# Altium PCB SiLPA.PcbDoc (part 10 of 10)
Units mm, origin at the board's own origin, x right, y up, seen from the top; angles counter-clockwise.
Board outline 222.36 x 100 mm, 4 copper layers (L1, P2, L3, L4), stack 1.598 mm thick; 583 components, 330 nets, 1692 pads, 1781 vias.
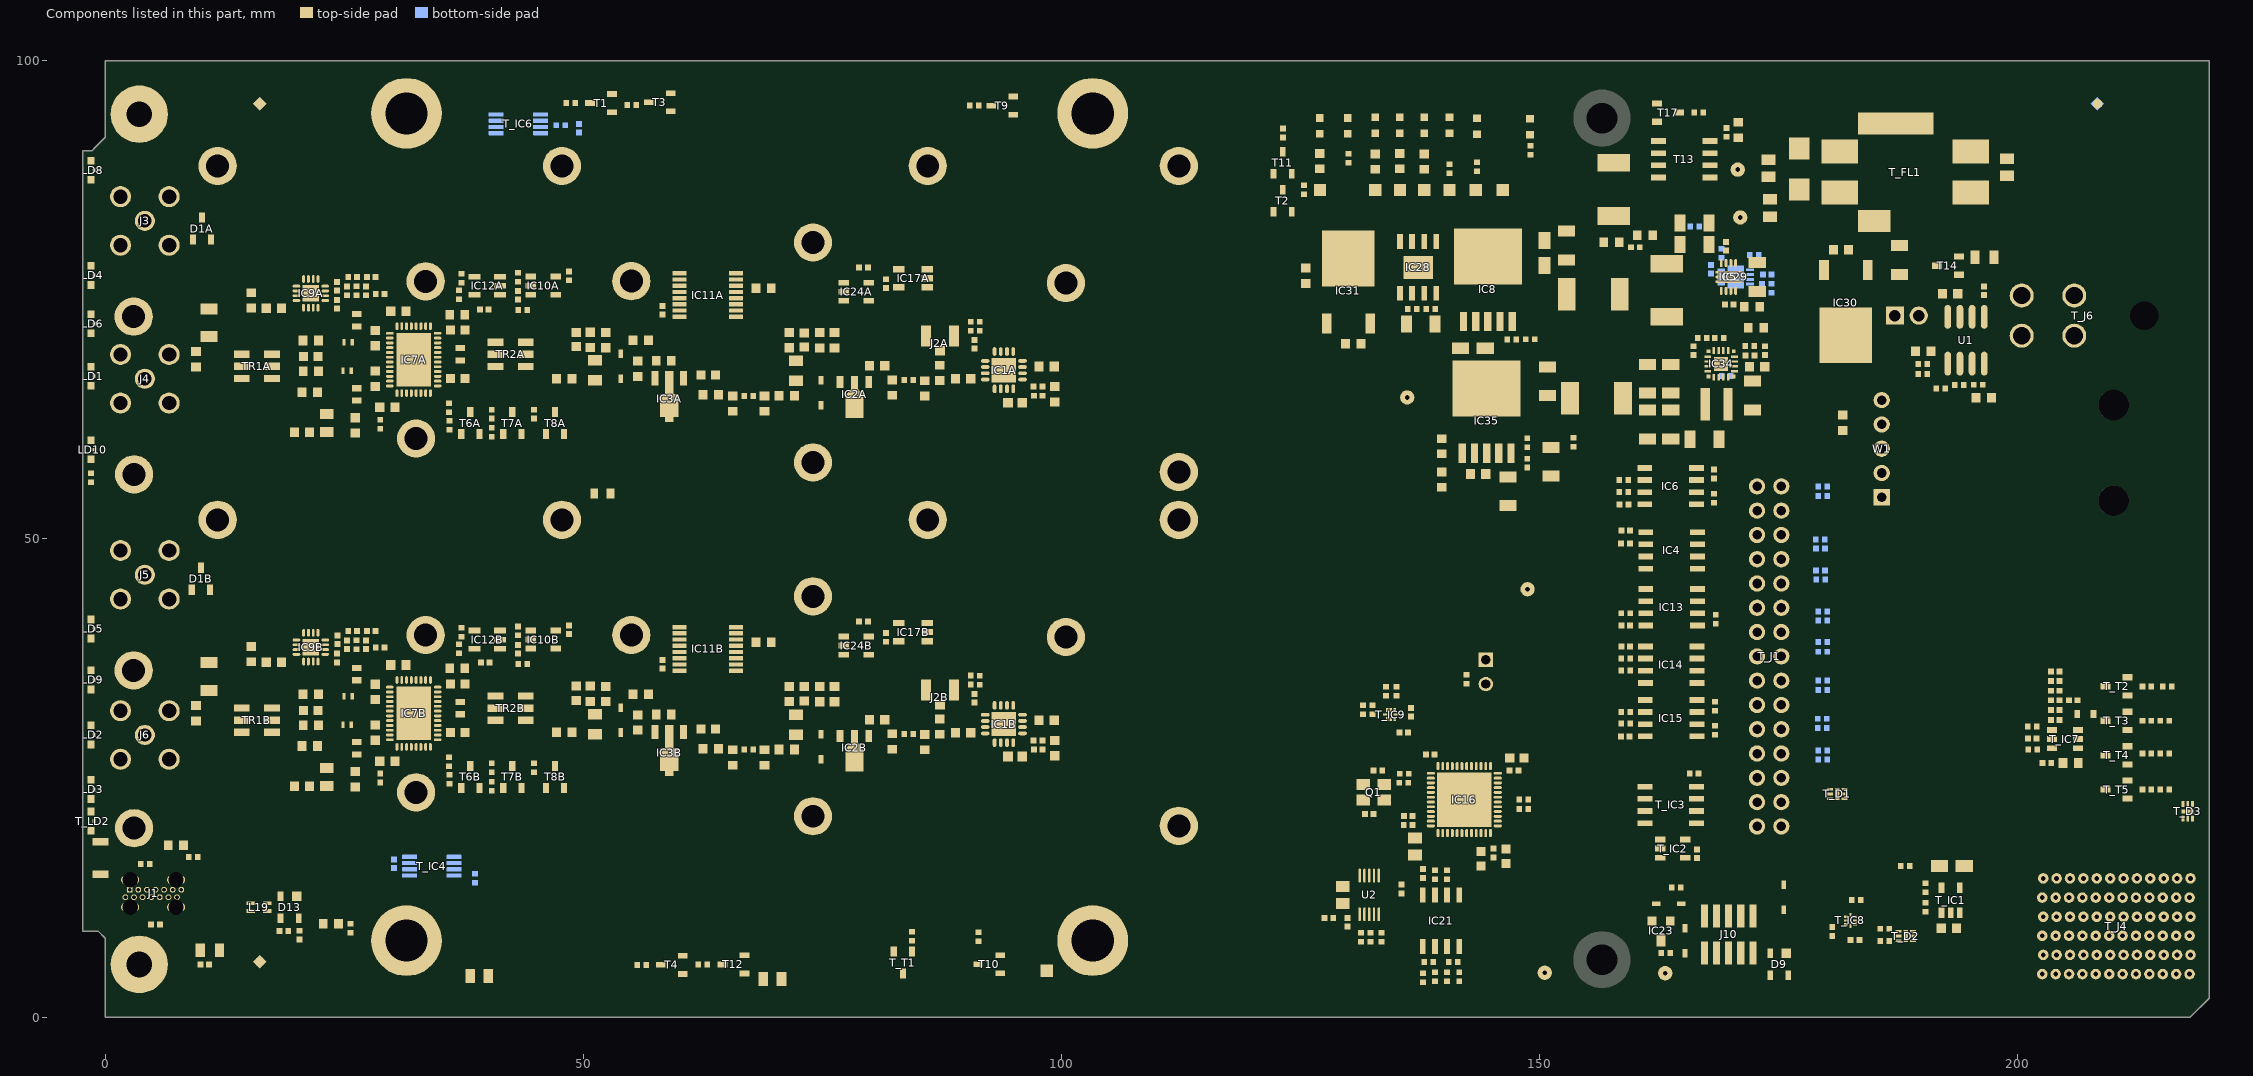
[diagram p10: the components of this part, seen from the top]

## Polygon pours and split planes (outlines as drawn) (continued)
no net on L3 "BAL_TOP" (solid, pour order 199): 4.85,97.439 218.754,97.439 218.754,2.392 4.85,2.392 4.85,7.366 1.528,7.366 -1.521,10.415 -1.521,77.916 0.966,80.403 0.966,91.166 4.85,91.166
P12V0A on L3 "NONET_L-01_P-001" (solid, remove dead copper, pour order 192): 108.25,28.75 120.75,28.75 121,28.5 121,27.5 120.5,27 108.75,27 108.25,27.5
P5V0A on L3 "NONET_L-01_P-001" (solid, remove dead copper, pour order 190): 146.75,72.25 146.75,70 146,69.25 138.75,69.25 137.25,67.75 123.25,67.75 122.25,66.75 120,66.75 119.25,67.5 119.25,69 120,69.75 136.25,69.75 139,72.5 146.5,72.5
P12V0A on L3 "NONET_L-01_P-001" (solid, remove dead copper, pour order 186): 118.25,56 138,56 138.25,56.25 148,56.25 148.5,55.75 148.5,54.75 148,54.25 147.5,53.75 118.25,53.75 117.75,54.25 117.75,55.5
P5V5A on L3 "NONET_L-01_P-001" (solid, remove dead copper, pour order 195): 133.296,75.79 133.556,76.05 144.017,76.05 144.375,75.692 144.375,74.454 143.864,73.943 134.3,73.943 133.885,73.528 132.814,73.528 132.6,73.742 132.6,75.127 133.264,75.79
GND on P2 (split plane): 219.49,2.191 217.809,0.51 0.51,0.51 0.51,8.25 0.501,8.35 0.472,8.445 0.424,8.534 0.361,8.611 -0.389,9.361 -0.466,9.424 -0.555,9.472 -0.65,9.501 -0.75,9.51 -1.846,9.51 -1.846,89.938 -1.846,90.065 -1.425,90.065 -1.325,90.074 -1.23,90.103 -1.141,90.151 -1.064,90.214 -0.639,90.639 0.361,91.639 0.424,91.716 0.472,91.805 0.501,91.9 0.51,92 0.51,99.489 219.49,99.489

## Keep-outs
L1:
  lines w0.1: 6.429,97.453 28.821,97.453 ; 34.325,97.453 100.677,97.453 ; 106.01,97.453 219.592,97.453
Keep-Out Layer:
  drawing of 6841 lines, arcs and shapes, not listed

## Other copper
L1:
  rectangle net GND: 77.213,25.41 79.5,28.403
  rectangle net GND: 77.457,24.575 79.086,31.525
  rectangle net GND: 77.383,61.75 79.283,65.025
  rectangle net GND: 76.791,61.75 80.253,65.403
  rectangle net GND: 77.457,61.35 79.141,65.669
  rectangle net P5V0A: 145,69.997 146.051,71.5
  rectangle net P5V0A: 135.788,67.895 137.274,71.097
  rectangle net P12V0_SW: 174,71 175.5,73.25
  region net NetC20_2: 128.1,10.065 128.103,10.061 131.252,10.061 131.252,11.35 128.637,11.35 128.1,10.812 128.1,10.375
  pour cut-out: 30.971,45.75 36.001,45.75 36.001,42.25 30.971,42.25 30.971,45.75 36.001,45.75
  pour cut-out: 28.964,22.75 35.958,22.75 35.958,19.25 28.964,19.25 28.964,22.75 33.993,22.75
  pour cut-out: 29.012,59.75 36.006,59.75 36.006,56.25 29.012,56.25 29.012,59.75 34.041,59.75
  pour cut-out: 30.954,82.75 35.984,82.75 35.984,79.25 30.954,79.25 30.954,82.75 35.984,82.75
  pour cut-out: 2.357,75.25 43.837,75.25 50.087,69 54.5,69 55.47,69.97 84.441,69.97 85.503,71.032 89.747,71.032 90.222,70.557 108.062,70.557 109.116,69.502 109.116,68.366 108.396,67.646 101.031,67.646 97.835,64.45 76.036,64.45 74.764,63.179 62.188,63.179 60.616,64.75 40.733,64.75 39.953,63.97 32.768,63.97 30.428,61.63 4.28,61.63 2.357,63.553
  pour cut-out: 2.357,38.25 43.837,38.25 50.087,32 54.5,32 55.47,32.97 84.441,32.97 85.503,34.032 89.747,34.032 90.222,33.557 108.062,33.557 109.116,32.502 109.116,31.366 108.396,30.646 101.031,30.646 97.835,27.45 76.036,27.45 74.764,26.179 62.188,26.179 60.616,27.75 40.733,27.75 39.953,26.97 32.768,26.97 30.428,24.63 4.28,24.63 2.357,26.553
L3:
  pour cut-out: 30.971,45.75 36.001,45.75 36.001,42.25 30.971,42.25 30.971,45.75 36.001,45.75
  pour cut-out: 28.964,22.75 35.958,22.75 35.958,19.25 28.964,19.25 28.964,22.75 33.993,22.75
  pour cut-out: 29.012,59.75 36.006,59.75 36.006,56.25 29.012,56.25 29.012,59.75 34.041,59.75
  pour cut-out: 30.954,82.75 35.984,82.75 35.984,79.25 30.954,79.25 30.954,82.75 35.984,82.75
L4:
  rectangle net GND: 169.627,74.791 171.416,79.833
  rectangle net P3V3: 178,66.25 185.75,78
  rectangle net P5V5A: 132.92,73.943 134.086,75.5
  rectangle net Sw_7V5: 167.725,75.676 168.364,76.667
  rectangle net P12V0_SW: 174.75,70.5 176.25,73.5
  rectangle net P5V0A: 120.25,67.75 121.25,69
  rectangle net P3V3A: 125.5,76.25 133.5,85.25
  pour cut-out: 30.971,45.75 36.001,45.75 36.001,42.25 30.971,42.25 30.971,45.75 36.001,45.75
  pour cut-out: 28.964,22.75 35.958,22.75 35.958,19.25 28.964,19.25 28.964,22.75 33.993,22.75
  pour cut-out: 29.012,59.75 36.006,59.75 36.006,56.25 29.012,56.25 29.012,59.75 34.041,59.75
  pour cut-out: 30.954,82.75 35.984,82.75 35.984,79.25 30.954,79.25 30.954,82.75 35.984,82.75
P2 (plane layer: these items are gaps in the copper):
  rectangle: 71.525,44.725 76.525,45.95
  rectangle: 32.225,42.69 34.921,45.525
  rectangle: 83.75,49.725 88.225,51.143
  rectangle: 45.446,49.725 50,51.15
  rectangle: 7.825,49.85 14,50.931
  rectangle: 8.089,87.175 13.925,88.525
  rectangle: 83.95,86.825 88.275,88.1
  rectangle: 45.8,87.2 49.625,88.375
  rectangle: 71.65,81.65 76.5,83.15
  rectangle: 32.4,79.325 34.625,82.675

## Silkscreen, mask and mechanical layers (free items; w line width, h text height)
TopOverlay:
  drawing of 1239 lines, arcs and shapes, not listed
  text "G" at 7.75,96.75 h1.02
  text "P3V3A" at 125.996,91.254 h1 r90
  text "P3V3MP" at 129.346,91.254 h1 r90
  text "P3V3" at 132.146,91.254 h1 r90
  text "P5V5" at 137.255,91.254 h1 r90
  text "P5V0A" at 134.746,91.004 h1 r90
  text "P12V0" at 139.895,91.004 h1 r90
  text "P12V0A" at 142.727,90.504 h1 r90
  text "P12V0" at 168.761,90.073 h1
  text "PSU_EN" at 151.25,89.919 h1 r90
  text "GND" at 146.608,88.19 h1 r90
  text "GND" at 169.549,85.065 h1
  text "G" at 183.229,64.254 h1
  text "GND" at 134.849,62.165 h1
  text "DE" at 182.56,61.754 h1
  text "EEM 1" at 171.729,60.75 h1.52
  text "Tx" at 182.379,59.004 h1
  text "Rx" at 182.306,56.565 h1
  text "V" at 182.754,53.854 h1
  text "UART" at 183.068,51.79 h1
  text "P3V3" at 146.943,46.45 h1
  text "SiLPA HL v1.1" at 121.253,39.686 h2
  text "TS 2026" at 128.158,37.955 h1
  text "G" at 16.571,25.632 h1.02
  text "GND" at 146.274,4.115 h1
  text "P3V3_MP" at 164.799,4.081 h1
BottomOverlay:
  drawing of 1237 lines, arcs and shapes, not listed
  text "SiLPA HL v1.0" at 137.841,11.735 h2
  text "ISE2022" at 126.241,10.182 h1
TopSolder:
  rectangle: 0.623,0.603 219.419,2.4
BottomSolder:
  rectangle: 0.623,0.603 219.419,2.4
Mechanical 1:
  drawing of 267 lines, arcs and shapes, not listed
Mechanical 2:
  lines w0.1: -2.544,-14.238 -2.544,108.444 ; 31.5,103.5 31.5,8 111.25,8 ; 103.25,8 103.25,104.75
Mechanical3:
  lines w0.1: -5.044,-14.238 -5.044,110.794 ; -2.544,-14.238 -2.544,111.067
SHIELD:
  lines w1: 10.1,4.4 10.1,4.9
Mechanical6:
  lines w3: 2.75,60.5 8,60.5 10.5,58 16.5,58 ; 2.75,77.25 11,77.25 14.75,81 30.5,81 ; 2.75,89.5 7,89.5 ; 15.75,88.5 43.75,88.5 ; 17,58 28.5,58 ; 36.5,58 70,58 ; 36.5,81 50,81 ; 47,81 70,81 ; 51,58 51,63 ; 51,76 51,80 ; 51.75,88.5 82,88.5 ; 78,58 103,58 105.5,60.5 105.5,65 ; 78,81 102,81 104.75,78.25 104.75,74.25 104.75,73.554 ; 90,88.5 105.5,88.5 112.25,81.75 112.25,71.75
Mechanical 13:
  lines w0.01: -3.35,-0.784 -3.35,80.924

## Text inside footprints (layer, text, board x,y; h text height)
J11: TopOverlay "1" at 186.885,74.747 h1; Mechanical 14 "1" at 186.885,74.747 h1
T_J1: TopOverlay "30" at 176.651,20.573 h1.02 r270; Mechanical 14 "30" at 176.651,20.573 h1.02 r270
T_J4: TopOverlay "A" at 218.439,1.3 h1 r90; TopOverlay "B" at 217.039,1.3 h1 r90; TopOverlay "C" at 215.639,1.3 h1 r90; TopOverlay "D" at 214.239,2.3 h1 r90; TopOverlay "E" at 212.839,2.3 h1 r90; TopOverlay "F" at 211.439,2.3 h1 r90; TopOverlay "G" at 210.039,2.3 h1 r90; TopOverlay "H" at 208.639,2.3 h1 r90; TopOverlay "I" at 207.239,2.55 h1 r90; TopOverlay "J" at 205.839,2.3 h1 r90; TopOverlay "K" at 204.439,2.3 h1 r90; TopOverlay "L" at 203.039,2.3 h1 r90; TopOverlay "1" at 197.989,4.15 h1 r90; TopOverlay "2" at 197.989,6.15 h1 r90; TopOverlay "3" at 197.989,8.15 h1 r90; TopOverlay "4" at 197.989,10.15 h1 r90; TopOverlay "5" at 197.989,12.15 h1 r90; TopOverlay "6" at 197.989,14.15 h1 r90; Drill Drawing "PRESS-FIT TECHNOLOGY" at 218.689,17 h1 r180; Drill Drawing "Diam. 0.5mm +/-0.05" at 218.689,18.5 h1 r180; Mechanical 14 "A" at 218.439,1.3 h1 r90; Mechanical 14 "B" at 217.039,1.3 h1 r90; Mechanical 14 "C" at 215.639,1.3 h1 r90; Mechanical 14 "D" at 214.239,2.3 h1 r90; Mechanical 14 "E" at 212.839,2.3 h1 r90; Mechanical 14 "F" at 211.439,2.3 h1 r90; Mechanical 14 "G" at 210.039,2.3 h1 r90; Mechanical 14 "H" at 208.639,2.3 h1 r90; Mechanical 14 "I" at 207.239,2.55 h1 r90; Mechanical 14 "J" at 205.839,2.3 h1 r90; Mechanical 14 "K" at 204.439,2.3 h1 r90; Mechanical 14 "L" at 203.039,2.3 h1 r90; Mechanical 14 "1" at 197.989,4.15 h1 r90; Mechanical 14 "2" at 197.989,6.15 h1 r90; Mechanical 14 "3" at 197.989,8.15 h1 r90; Mechanical 14 "4" at 197.989,10.15 h1 r90; Mechanical 14 "5" at 197.989,12.15 h1 r90; Mechanical 14 "6" at 197.989,14.15 h1 r90; Mechanical 8 "Top Surface of Mother Board" at 232.289,5.125 h0.5 r90; Mechanical 8 "Edge of Daugher Card" at 220.789,6.275 h0.5 r90
T_J6: TopOverlay "1" at 205.177,78.627 h1.2 r270; Mechanical 14 "1" at 204.939,77.825 h1.2 r270